# Altium PCB StLink.PcbDoc (part 1 of 3)
Units mm, origin at the board's own origin, x right, y up, seen from the top; angles counter-clockwise.
Board outline 13.1 x 14.6 mm, 6 copper layers (Top Layer, GND, VCC, S3, S4, Bottom Layer), stack 1.623 mm thick; 39 components, 26 nets, 150 pads, 52 vias.
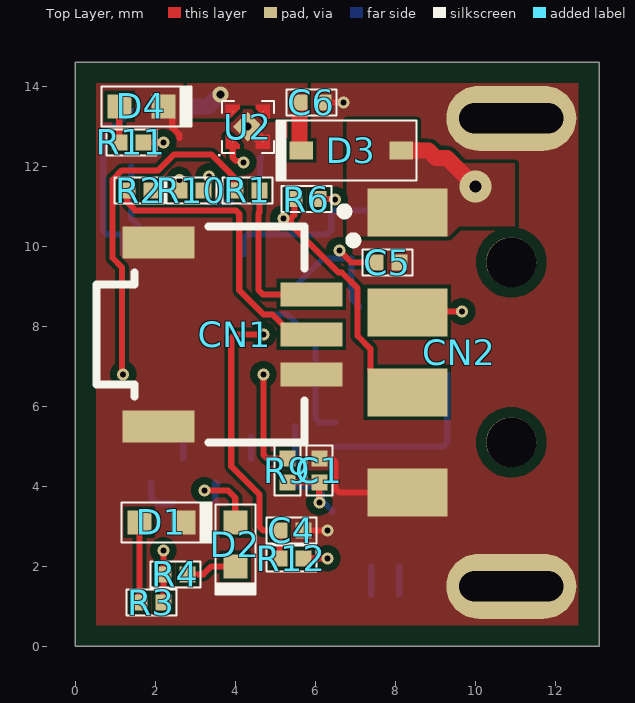
[diagram p0: Top Layer view]
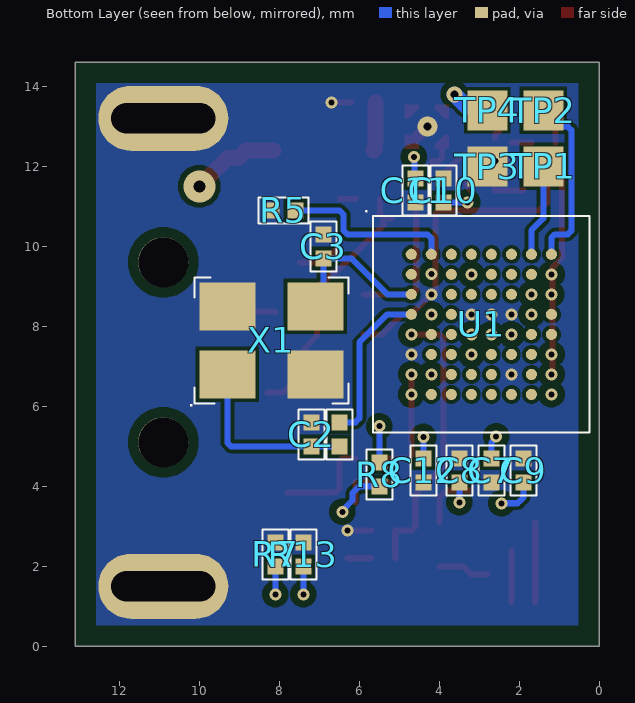
[diagram p1: Bottom Layer view, seen from below]
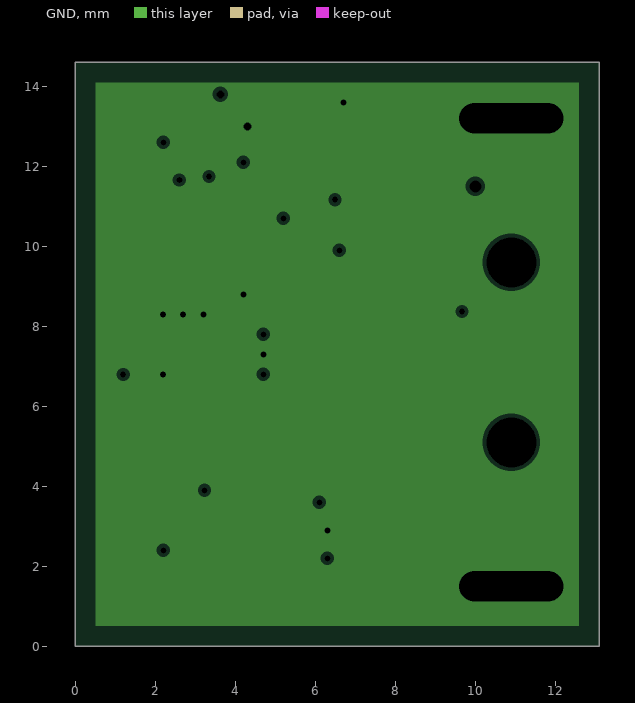
[diagram p2: GND, clearances drawn from the general rule]
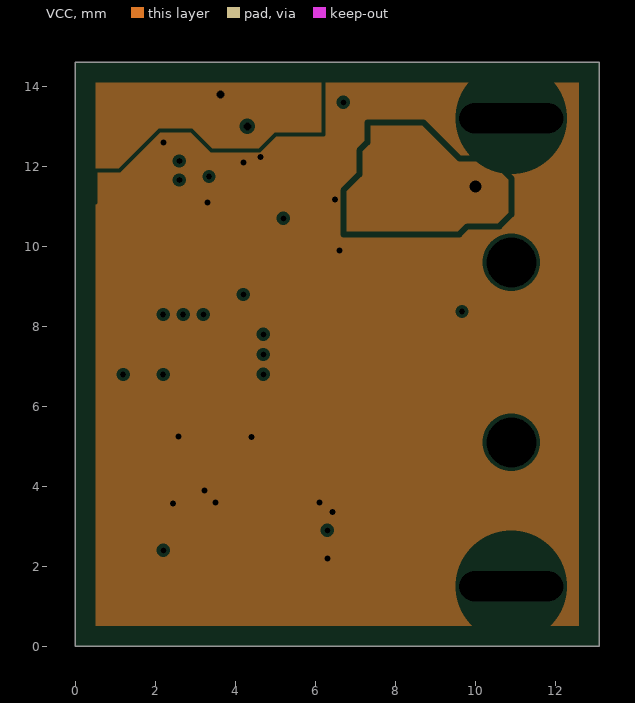
[diagram p3: VCC, clearances drawn from the general rule]
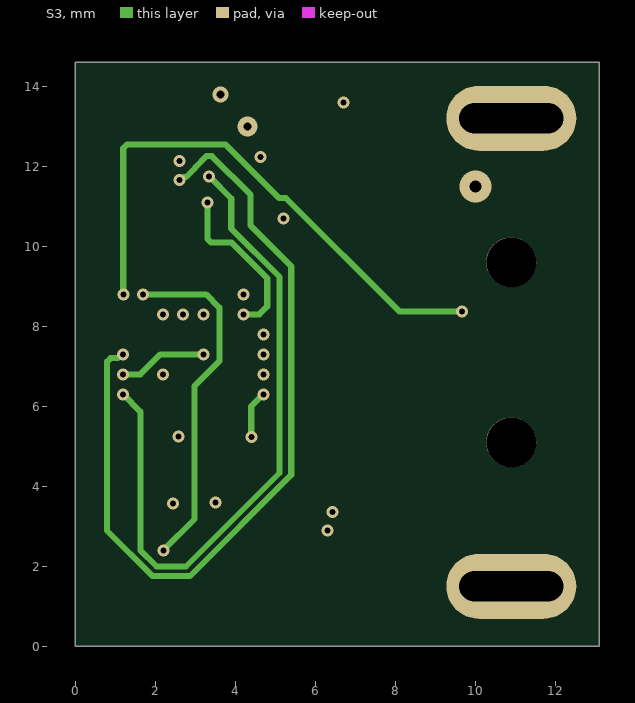
[diagram p4: S3]
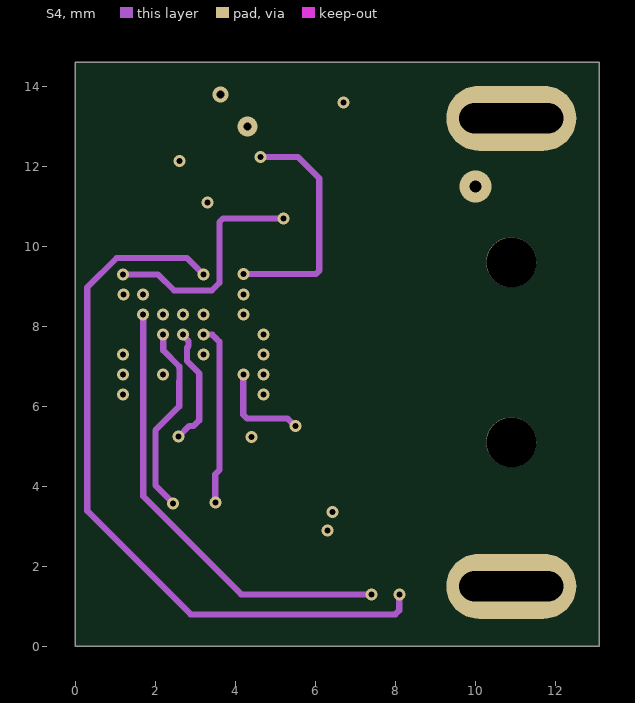
[diagram p5: S4]

## Layer stack, top to bottom
Top Solder: solder mask 0.0102, Solder Resist, Dk 3.5
Top Layer: signal copper 0.0175
Dielectric 1: prepreg 0.196, 7628, Dk 4.74
GND: plane copper 0.035, net GND
Dielectric 2: core 0.43, FR-4, Dk 4.6
VCC: plane copper 0.035, net (Multiple Nets)
Dielectric 3: prepreg 0.196, 7628, Dk 4.74
S3: signal copper 0.035
Dielectric 4: core 0.43, FR-4, Dk 4.6
S4: signal copper 0.035
Dielectric 5: prepreg 0.196, 7628, Dk 4.74
Bottom Layer: signal copper 0.0175
Bottom Solder: solder mask 0.01, Solder Resist, Dk 3.5

## Board outline
0,0 13.1,0 13.1,14.6 0,14.6

## Design rules (kind name [scope] priority, off if disabled: settings)
BoardOutlineClearance [All] p1: gap=0.1 ignorepadtopadclearanceinfootprint=FALSE
Clearance [All] p1: gap=0.089 ignorepadtopadclearanceinfootprint=TRUE except(0.127: Arc-Via Track-Via SMDPad-Via THPad-Via Via-Via Via-Fill Via-Poly Via-Region Via-Text; 0.254: Arc-Hole Track-Hole SMDPad-Hole THPad-Hole Via-Hole Fill-Hole Poly-Hole Region-Hole Text-Hole)
ComponentClearance [All] p1: gap=0.089 collisioncheckmode=3 verticalgap=0.089 showdistances=TRUE
DiffPairsRouting [All] p1: maxlimit=0.089 minlimit=0.089 mostfreqgap=0.089 toplayer_minwidth=0.089 toplayer_maxwidth=25.4 toplayer_prefwidth=0.089 midlayer1_minwidth=0.089 midlayer1_maxwidth=25.4 midlayer1_prefwidth=0.089 midlayer2_minwidth=0.089 midlayer2_maxwidth=25.4 midlayer2_prefwidth=0.089 bottomlayer_minwidth=0.089 bottomlayer_maxwidth=25.4 bottomlayer_prefwidth=0.089 maxuncoupledlength=12.7
Height [All] p1: minheight=0 maxheight=1816.048 prefheight=12.7
HoleSize [All] p1: absolutevalues=TRUE maxlimit=6.3 minlimit=0.1 maxpercent=80.000 minpercent=20.000
HoleToHoleClearance [All] p1: gap=0.1 allowstackedmicrovias=FALSE
MinimumAnnularRing [All] p1: minimumring=0.05
MinimumSolderMaskSliver [All] p1: minsoldermaskwidth=0.1
PlaneClearance [All] p1: clearance=0.089
PlaneConnect PlaneConnectPowerPads [InPadClass('PowerPads')] p1: planeconnectstyle=Direct reliefexpansion=0.508 reliefentries=4 reliefconductorwidth=0.254 reliefairgap=0.254
PlaneConnect [All] p2: pad.planeconnectstyle=Relief pad.reliefexpansion=0.3 pad.reliefentries=4 pad.reliefconductorwidth=0.089 pad.reliefairgap=0.089 via.planeconnectstyle=Direct via.reliefexpansion=0.3 via.reliefentries=4 via.reliefconductorwidth=0.127 via.reliefairgap=0.127
PolygonConnect PolygonConnectPowerPads [All vs (InPadClass('PowerPads'))] p1: connectstyle=Direct reliefconductorwidth=0.254 reliefentries=4 polygonreliefangle="90 Angle" airgapwidth=0.254
PolygonConnect [All] p2: connectstyle=Direct reliefconductorwidth=0.089 reliefentries=4 polygonreliefangle="90 Angle" airgapwidth=0.089
RoutingVias [All] p1: holewidth=0.15 width=0.3 viastyle="Through Hole" minholewidth=0.15 minwidth=0.3 maxholewidth=6.3 maxwidth=6.55
SilkToSilkClearance [All] p1: silktosilkclearance=0.127
SilkToSolderMaskClearance [IsPad] p1: minsilkscreentomaskgap=0.05 clearancetoexposedcopper=TRUE
SolderMaskExpansion [All] p1: expansion=0.051 istentingtop=FALSE
SupplyNets "Schematic Supply Nets_3" [InNet('3.3V')] p1: voltage=0.000
SupplyNets "Schematic Supply Nets_2" [InNet('U5V')] p2: voltage=0.000
SupplyNets "Schematic Supply Nets_1" [InNet('5V')] p3: voltage=0.000
SupplyNets "Schematic Supply Nets" [InNet('GND')] p4: voltage=0.000
UnRoutedNet [All] p1: checkbadconnections=TRUE
Width Width_6mil [All] p1: maxlimit=25.4 minlimit=0.152 preferedwidth=0.152 checkconnectedcopper=TRUE
Width Power_20mil [All] p2: maxlimit=25.4 minlimit=0.508 preferedwidth=0.508 minimp=50.000000 maximp=50.000000 favimp=50.000000
Width Power_12mil [All] p3: maxlimit=25.4 minlimit=0.305 preferedwidth=0.305 minimp=50.000000 maximp=50.000000 favimp=50.000000
Width Width_3.5mil [All] p4: maxlimit=25.4 minlimit=0.089 preferedwidth=0.089 minimp=50.000000 maximp=50.000000 favimp=50.000000
19 further rules are at their usual default settings.

## Components (designator, comment, footprint, x,y, rotation, side; value= is the part's Value field where it differs from the comment)
C1 "100nF" C0201 6.1,4.4 r90 top
C2 "15pF" C0201 7.2,5.3 r270 bottom
C3 "15pF" C0201 6.9,10 r270 bottom
C4 "100nF" C0201 5.4,2.9 r0 top
C5 "1uF" C0201 7.8,9.6 r0 top value=1µF
C6 "1uF" C0201 5.9,13.6 r0 top value=1µF
C7 "100nF" C0201 2.7,4.4 r270 bottom
C8 "100nF" C0201 3.5,4.4 r90 bottom
C9 "100nF" C0201 1.9,4.4 r90 bottom
C10 "100nF" C0201 3.9,11.4 r90 bottom
C11 "100nF" C0201 4.6,11.4 r270 bottom
C12 "100nF" C0201 4.4,4.4 r270 bottom
CN1 "Header 3" H3X1 5.9,7.8 r270 top
CN2 "USB - 0480372200" "USB A" 10.9,7.223 r90 top
D1 "RED" "LED 0402" 2.15,3.1 r180 top
D2 "GREEN" "LED 0402" 4,2.55 r90 top
D3 "BAT54WS-7-F" SOD323 6.9,12.4 r0 top value=10pF
D4 "RED" "LED 0402" 1.65,13.5 r180 top
R1 "100" R0201 4.3,11.4 r180 top value=100Ω
R2 "100" R0201 1.6,11.4 r0 top value=100Ω
R3 "82" R0201 1.9,1.1 r180 top value=82Ω
R4 "82" R0201 2.5,1.8 r0 top value=82Ω
R5 "1K" R0201 7.9,10.9 r180 bottom value=1kΩ
R6 "1.5K" R0201 5.778,11.178 r0 top value=1.5kΩ
R7 "1K" R0201 8.1,2.3 r270 bottom value=1kΩ
R8 "1K" R0201 5.5,4.3 r270 bottom value=1kΩ
R9 "100" R0201 5.3,4.4 r270 top value=100Ω
R10 "82" R0201 2.9,11.4 r0 top value=82Ω
R11 "82" R0201 1.4,12.6 r0 top value=82Ω
R12 "100K" R0201 5.4,2.2 r0 top value=100kΩ
R13 "1K" R0201 7.4,2.3 r270 bottom value=1kΩ
R14 "0" R0201 6.5,5.3 r90 bottom value=0Ω
TP1 "Test_Point" PAD 1.4,12 r90 bottom
TP2 "Test_Point" PAD 1.4,13.4 r90 bottom
TP3 "Test_Point" PAD 2.8,12 r90 bottom
TP4 "Test_Point" PAD 2.8,13.4 r90 bottom
U1 "STM32F103R8H6" "MICRO BGA" 2.949,8.049 r180 bottom
U2 "AP7343D" AP7343D 4.312,12.987 r0 top
X1 "8MHz" "CRISTAL ECS" 8.2,7.65 r180 bottom

## Footprints (in the part's own frame and the unit in brackets; to place one, negate y for a bottom-side part, rotate by r counter-clockwise, add the part's x,y. Pads: shape width x height; smd on the part's side, far side on the other; paste and mask are expansions set on the pad)
AP7343D [mm]
  round 0.025 smd mask+0.04: 1(-0.375,-0.375) 2(0.375,-0.375) 3(0.375,0.375) 4(-0.375,0.375)
  rect 0.53x0.53 smd rot 45 mask+0.04: 5(0,0)
  Top Layer region: -0.2,-0.45 -0.45,-0.2 -0.55,-0.2 -0.55,-0.55 -0.2,-0.55
  Top Layer region: 0.2,0.45 0.45,0.2 0.55,0.2 0.55,0.55 0.2,0.55
  Top Layer region: 0.45,-0.2 0.2,-0.45 0.2,-0.55 0.55,-0.55 0.55,-0.2
  Top Layer region: -0.45,0.2 -0.2,0.45 -0.2,0.55 -0.55,0.55 -0.55,0.2
  silkscreen extent -0.72,-0.72 0.65,0.65, body extent -0.5,-0.5 0.5,0.5, height 0.4
C0201 [mm]
  rect 0.4x0.4 smd mask+0.05: 1(-0.3,0) 2(0.3,0)
  silkscreen extent -0.63,-0.33 0.63,0.33, body extent -0.3,-0.15 0.3,0.15, height 0.27
"CRISTAL ECS" [mm]
  rect 1.4x1.2 smd paste+0 mask+0.05: 1(-1.1,-0.85) 2(1.1,-0.85) 3(1.1,0.85) 4(-1.1,0.85)
  silkscreen extent -2.01,-1.63 1.93,1.58, body extent -1.63,-1.25 1.57,1.25, height 0.81
H3X1 [mm]
  rect 0.6x1.55 smd mask+0.05: 1(-1,0) 2(0,0) 3(1,0)
  rect 0.8x1.8 smd mask+0.05: S1(-2.3,-3.825) S2(2.3,-3.825)
  silkscreen extent -2.7,-5.38 2.7,1.15, body extent -2.7,-5.45 2.7,0.45, height 4.16
"LED 0402" [mm]
  rect 0.6x0.6 smd mask+0.05: 1(-0.55,0) 2(0.55,0)
  silkscreen extent -1.25,-0.5 1,0.5, body extent -0.53,-0.25 0.47,0.25, height 0.4
"MICRO BGA" [mil]
  round 11 smd paste+0 mask+0: A1(-68.95,68.95) A2(-49.25,68.95) A3(-29.55,68.95) A4(-9.85,68.95) A5(9.85,68.95) A6(29.55,68.95) A7(49.25,68.95) A8(68.95,68.95) B1(-68.95,49.25) B2(-49.25,49.25) B3(-29.55,49.25) B4(-9.85,49.25) B5(9.85,49.25) B6(29.55,49.25) B7(49.25,49.25) B8(68.95,49.25) C1(-68.95,29.55) C2(-49.25,29.55) C3(-29.55,29.55) C4(-9.85,29.55) C5(9.85,29.55) C6(29.55,29.55) C7(49.25,29.55) C8(68.95,29.55) D1(-68.95,9.85) D2(-49.25,9.85) D3(-29.55,9.85) D4(-9.85,9.85) D5(9.85,9.85) D6(29.55,9.85) D7(49.25,9.85) D8(68.95,9.85) E1(-68.95,-9.85) E2(-49.25,-9.85) E3(-29.55,-9.85) E4(-9.85,-9.85) E5(9.85,-9.85) E6(29.55,-9.85) E7(49.25,-9.85) E8(68.95,-9.85) F1(-68.95,-29.55) F2(-49.25,-29.55) F3(-29.55,-29.55) F4(-9.85,-29.55) F5(9.85,-29.55) F6(29.55,-29.55) F7(49.25,-29.55) F8(68.95,-29.55) G1(-68.95,-49.25) G2(-49.25,-49.25) G3(-29.55,-49.25) G4(-9.85,-49.25) G5(9.85,-49.25) G6(29.55,-49.25) G7(49.25,-49.25) G8(68.95,-49.25) H1(-68.95,-68.95) H2(-49.25,-68.95) H3(-29.55,-68.95) H4(-9.85,-68.95) H5(9.85,-68.95) H6(29.55,-68.95) H7(49.25,-68.95) H8(68.95,-68.95)
  silkscreen extent -114,-107 107,112, body extent -101,-101 101,101, height 47
PAD [mm]
  rect 1x1 smd mask+0.05: 1(0,0)
R0201 [mm]
  rect 0.4x0.4 smd mask+0.05: 1(-0.3,0) 2(0.3,0)
  silkscreen extent -0.63,-0.33 0.63,0.33, body extent -0.3,-0.15 0.3,0.15, height 0.27
SOD323 [mm]
  rect 0.59x0.45 smd mask+0.05: 1(-1.25,0) 2(1.25,0)
  silkscreen extent -1.88,-0.75 1.63,0.75, body extent -1.35,-0.7 1.35,0.7, height 0.81
"USB A" [mm]
  rect 1.2x2 smd mask+0.05: 1(3.627,2.6) 2(1.127,2.6) 3(-0.873,2.6) 4(-3.373,2.6)
  oval 1.625x3.25 hole 0.75 slot 2.6 at 90 deg mask+0.05: 5(-5.723,0) 6(5.977,0)
  round 1.25 hole 1.25 unplated mask+0.05: ""(-2.123,0) ""(2.377,0)
  silkscreen extent 3.55,4.08 3.75,4.27, body extent -5.92,-17.68 6.12,3.27, height 2.11

## Part data
C1 C4 C7 C8 C9 C10 C11 C12: library part GRM033R60J104KE19D, "6.3V 100nF X5R ±10% 0201 Multilayer Ceramic Capacitors MLCC - SMD/SMT ROHS", Case Code (Imperial)=0201, Case Code (Metric)=0603, Dielectric=X5R, Dielectric Material=Ceramic, Manufacturer=Murata, Manufacturer Lifecycle Status="IN PRODUCTION", Max Operating Temperature=85°C, Min Operating Temperature=-55°C, Supplier Part Number=490-3167-6-ND, Tolerance=10%, Voltage=6.3V, Case/Package=0201, Category="Ceramic Capacitors", ComponentLink1Description=https://datasheet.octopart.com:443/GRM033R60J104KE19D-Murata-datasheet-5390194.pdf?src-supplier=Upverter, ComponentLink1URL=https://datasheet.octopart.com:443/GRM033R60J104KE19D-Murata-datasheet-5390194.pdf?src-supplier=Upverter, ComponentLink2Description=https://datasheet.octopart.com:443/GRM033R60J104KE19D-Murata-datasheet-62317028.pdf?src-supplier=element14+APAC, ComponentLink2URL=https://datasheet.octopart.com:443/GRM033R60J104KE19D-Murata-datasheet-62317028.pdf?src-supplier=element14+APAC, ComponentLink3Description=https://datasheet.octopart.com:443/GRM033R60J104KE19D-Murata-datasheet-17853058.pdf?src-supplier=element14+APAC, ComponentLink3URL=https://datasheet.octopart.com:443/GRM033R60J104KE19D-Murata-datasheet-17853058.pdf?src-supplier=element14+APAC, ComponentLink4Description=https://datasheet.octopart.com:443/GRM033R60J104KE19D-Murata-datasheet-8397485.pdf?src-supplier=Newark, ComponentLink4URL=https://datasheet.octopart.com:443/GRM033R60J104KE19D-Murata-datasheet-8397485.pdf?src-supplier=Newark, ComponentLink5Description=https://datasheet.octopart.com:443/GRM033R60J104KE19D-Murata-datasheet-14399027.pdf?src-supplier=Future+Electronics, ComponentLink5URL=https://datasheet.octopart.com:443/GRM033R60J104KE19D-Murata-datasheet-14399027.pdf?src-supplier=Future+Electronics, ComponentLink6Description=https://datasheet.octopart.com:443/GRM033R60J104KE19D-Murata-datasheet-22122223.pdf?src-supplier=Future+Electronics, ComponentLink6URL=https://datasheet.octopart.com:443/GRM033R60J104KE19D-Murata-datasheet-22122223.pdf?src-supplier=Future+Electronics, ComponentLink7Description=https://datasheet.octopart.com:443/GRM033R60J104KE19D-Murata-datasheet-44105374.pdf?src-supplier=Future+Electronics, ComponentLink7URL=https://datasheet.octopart.com:443/GRM033R60J104KE19D-Murata-datasheet-44105374.pdf?src-supplier=Future+Electronics, ComponentLink8Description=https://datasheet.octopart.com:443/GRM033R60J104KE19D-Murata-datasheet-165579666.pdf?src-supplier=TME, ComponentLink8URL=https://datasheet.octopart.com:443/GRM033R60J104KE19D-Murata-datasheet-165579666.pdf?src-supplier=TME, ComponentLink9Description=https://datasheet.octopart.com:443/GRM033R60J104KE19D-Murata-datasheet-140710156.pdf?src-supplier=TME, ComponentLink9URL=https://datasheet.octopart.com:443/GRM033R60J104KE19D-Murata-datasheet-140710156.pdf?src-supplier=TME, ComponentLink10Description=https://datasheet.octopart.com:443/GRM033R60J104KE19D-Murata-datasheet-141274201.pdf?src-supplier=Ciiva, ComponentLink10URL=https://datasheet.octopart.com:443/GRM033R60J104KE19D-Murata-datasheet-141274201.pdf?src-supplier=Ciiva, ComponentLink11Description=https://datasheet.octopart.com:443/GRM033R60J104KE19D-Murata-datasheet-140675741.pdf?src-supplier=Ciiva, ComponentLink11URL=https://datasheet.octopart.com:443/GRM033R60J104KE19D-Murata-datasheet-140675741.pdf?src-supplier=Ciiva, ComponentLink12Description=https://datasheet.octopart.com:443/GRM033R60J104KE19D-Murata-datasheet-138738333.pdf?src-supplier=Ciiva, ComponentLink12URL=https://datasheet.octopart.com:443/GRM033R60J104KE19D-Murata-datasheet-138738333.pdf?src-supplier=Ciiva, ComponentLink13Description=https://datasheet.octopart.com/GRM033R60J104KE19D-Murata-datasheet-12515295.pdf, ComponentLink13URL=https://datasheet.octopart.com/GRM033R60J104KE19D-Murata-datasheet-12515295.pdf, ComponentLink14Description=https://datasheet.octopart.com/GRM033R60J104KE19D-Murata-datasheet-12510076.pdf, ComponentLink14URL=https://datasheet.octopart.com/GRM033R60J104KE19D-Murata-datasheet-12510076.pdf, ComponentLink15Description=https://datasheet.octopart.com/GRM033R60J104KE19D-Murata-datasheet-11978611.pdf, ComponentLink15URL=https://datasheet.octopart.com/GRM033R60J104KE19D-Murata-datasheet-11978611.pdf, ComponentLink16Description=https://datasheet.octopart.com/GRM033R60J104KE19D-Murata-datasheet-10025737.pdf, ComponentLink16URL=https://datasheet.octopart.com/GRM033R60J104KE19D-Murata-datasheet-10025737.pdf, ComponentLink17Description=https://datasheet.octopart.com/GRM033R60J104KE19D-Murata-datasheet-8819587.pdf, ComponentLink17URL=https://datasheet.octopart.com/GRM033R60J104KE19D-Murata-datasheet-8819587.pdf, ComponentLink18Description=https://datasheet.octopart.com:443/GRM033R60J104KE19D-Murata-datasheet-12510170.pdf?src-supplier=Factory+Futures, ComponentLink18URL=https://datasheet.octopart.com:443/GRM033R60J104KE19D-Murata-datasheet-12510170.pdf?src-supplier=Factory+Futures, ComponentLink19Description=https://datasheet.octopart.com:443/GRM033R60J104KE19D-Murata-datasheet-8517407.pdf?src-supplier=Factory+Futures, ComponentLink19URL=https://datasheet.octopart.com:443/GRM033R60J104KE19D-Murata-datasheet-8517407.pdf?src-supplier=Factory+Futures, ComponentLink20Description=https://datasheet.octopart.com:443/GRM033R60J104KE19D-Murata-datasheet-8387045.pdf?src-supplier=Factory+Futures, ComponentLink20URL=https://datasheet.octopart.com:443/GRM033R60J104KE19D-Murata-datasheet-8387045.pdf?src-supplier=Factory+Futures, ComponentLink21Description=https://datasheet.octopart.com:443/GRM033R60J104KE19D-Murata-datasheet-8324201.pdf?src-supplier=Factory+Futures, ComponentLink21URL=https://datasheet.octopart.com:443/GRM033R60J104KE19D-Murata-datasheet-8324201.pdf?src-supplier=Factory+Futures, ComponentLink22Description=https://datasheet.octopart.com:443/GRM033R60J104KE19D-Murata-datasheet-7628724.pdf?src-supplier=Factory+Futures, ComponentLink22URL=https://datasheet.octopart.com:443/GRM033R60J104KE19D-Murata-datasheet-7628724.pdf?src-supplier=Factory+Futures, ComponentLink23Description=https://datasheet.octopart.com:443/GRM033R60J104KE19D-Murata-datasheet-552801.pdf?src-supplier=Factory+Futures, ComponentLink23URL=https://datasheet.octopart.com:443/GRM033R60J104KE19D-Murata-datasheet-552801.pdf?src-supplier=Factory+Futures, ComponentLink24Description=https://datasheet.octopart.com:443/GRM033R60J104KE19D.-Murata-datasheet-5332913.pdf?src-supplier=Farnell, ComponentLink24URL=https://datasheet.octopart.com:443/GRM033R60J104KE19D.-Murata-datasheet-5332913.pdf?src-supplier=Farnell, ComponentLink25Description=https://datasheet.octopart.com:443/GRM033R60J104KE19D-Murata-datasheet-148210.pdf?src-supplier=Garrett, ComponentLink25URL=https://datasheet.octopart.com:443/GRM033R60J104KE19D-Murata-datasheet-148210.pdf?src-supplier=Garrett, ComponentLink26Description=https://datasheet.octopart.com:443/GRM033R60J104KE19D-Murata-datasheet-118811.pdf?src-supplier=DigiKey, ComponentLink26URL=https://datasheet.octopart.com:443/GRM033R60J104KE19D-Murata-datasheet-118811.pdf?src-supplier=DigiKey, ComponentLink27Description=http://sigma.octopart.com:80/reach_statement/Murata-company-16.pdf?src-supplier=Compliance+Statements, ComponentLink27URL=http://sigma.octopart.com:80/reach_statement/Murata-company-16.pdf?src-supplier=Compliance+Statements, Country of Origin=Philippines, Depth=300µm, Export Control Classification Number (ECCN) Code=EAR99, Harmonized Tariff Schedule (HTS) Code=8532.24.00.20, Height=300µm, Introduction Date=2004-09-04, Lead Free="Lead Free", Length=600µm, Lifecycle Status=Production, Manufacturer Part Number=GRM033R60J104KE19D, Material=Ceramic, Mounting Technology="Surface Mount", Number of Terminals=2, Packaging="Cut Tape (CT)", Pins=2, Pricing="1=0,1, 10=0,013, 50=0,0084, 100=0,007, 500=0,00476, 1000=0,00409, 2500=0,00338, 5000=0,00295 (USD)", Radiation Hardening=No, REACH SVHC=Yes, RoHS=Compliant, Schedule B="8532240020, 8532240020|8532240020, 8532240020|8532240020|8532240020, 8532240020|8532240020|8532240020|8532240020", Stock=19959733, Supplier=DigiKey, Supplier 1=DigiKey, Supplier Part Number 1=490-3167-6-ND, Termination=SMD/SMT, Thickness=300µm, Voltage Rating=6.3V, Voltage Rating (DC)=6.3V, Weight=170.097139µg, Width=300µm
C2 C3: library part GRM0335C1E150JA01D, "25V 15pF C0G ±5% 0201 Multilayer Ceramic Capacitors MLCC - SMD/SMT ROHS", Case Code (Imperial)=0201, Case Code (Metric)=0603, Dielectric=C0G, Dielectric Material=Ceramic, Manufacturer=Murata, Manufacturer Lifecycle Status="IN PRODUCTION", Max Operating Temperature=125°C, Min Operating Temperature=-55°C, Supplier Part Number=490-9658-1-ND, Temperature Coefficient=30ppm/°C, Tolerance=5%, Voltage Rating=25V, Case/Package=0201, Category="Ceramic Capacitors", ComponentLink1Description=https://datasheet.octopart.com:443/GRM0335C1E150JA01D-Murata-datasheet-62317006.pdf?src-supplier=element14+APAC, ComponentLink1URL=https://datasheet.octopart.com:443/GRM0335C1E150JA01D-Murata-datasheet-62317006.pdf?src-supplier=element14+APAC, ComponentLink2Description=https://datasheet.octopart.com:443/GRM0335C1E150JA01D-Murata-datasheet-12532738.pdf?src-supplier=HQonline, ComponentLink2URL=https://datasheet.octopart.com:443/GRM0335C1E150JA01D-Murata-datasheet-12532738.pdf?src-supplier=HQonline, ComponentLink3Description=https://datasheet.octopart.com:443/GRM0335C1E150JA01D-Murata-datasheet-165579666.pdf?src-supplier=TME, ComponentLink3URL=https://datasheet.octopart.com:443/GRM0335C1E150JA01D-Murata-datasheet-165579666.pdf?src-supplier=TME, ComponentLink4Description=https://datasheet.octopart.com:443/GRM0335C1E150JA01D-Murata-datasheet-141273935.pdf?src-supplier=Ciiva, ComponentLink4URL=https://datasheet.octopart.com:443/GRM0335C1E150JA01D-Murata-datasheet-141273935.pdf?src-supplier=Ciiva, ComponentLink5Description=https://datasheet.octopart.com:443/GRM0335C1E150JA01D-Murata-datasheet-140673894.pdf?src-supplier=Ciiva, ComponentLink5URL=https://datasheet.octopart.com:443/GRM0335C1E150JA01D-Murata-datasheet-140673894.pdf?src-supplier=Ciiva, ComponentLink6Description=https://datasheet.octopart.com:443/GRM0335C1E150JA01D-Murata-datasheet-138736674.pdf?src-supplier=Ciiva, ComponentLink6URL=https://datasheet.octopart.com:443/GRM0335C1E150JA01D-Murata-datasheet-138736674.pdf?src-supplier=Ciiva, ComponentLink7Description=https://datasheet.octopart.com:443/GRM0335C1E150JA01D-Murata-datasheet-22122223.pdf?src-supplier=Future+Electronics, ComponentLink7URL=https://datasheet.octopart.com:443/GRM0335C1E150JA01D-Murata-datasheet-22122223.pdf?src-supplier=Future+Electronics, ComponentLink8Description=https://datasheet.octopart.com/GRM0335C1E150JA01D-Murata-datasheet-12515295.pdf, ComponentLink8URL=https://datasheet.octopart.com/GRM0335C1E150JA01D-Murata-datasheet-12515295.pdf, ComponentLink9Description=https://datasheet.octopart.com/GRM0335C1E150JA01D-Murata-datasheet-12510076.pdf, ComponentLink9URL=https://datasheet.octopart.com/GRM0335C1E150JA01D-Murata-datasheet-12510076.pdf, ComponentLink10Description=https://datasheet.octopart.com/GRM0335C1E150JA01D-Murata-datasheet-11978611.pdf, ComponentLink10URL=https://datasheet.octopart.com/GRM0335C1E150JA01D-Murata-datasheet-11978611.pdf, ComponentLink11Description=https://datasheet.octopart.com/GRM0335C1E150JA01D-Murata-datasheet-10025737.pdf, ComponentLink11URL=https://datasheet.octopart.com/GRM0335C1E150JA01D-Murata-datasheet-10025737.pdf, ComponentLink12Description=https://datasheet.octopart.com/GRM0335C1E150JA01D-Murata-datasheet-8819587.pdf, ComponentLink12URL=https://datasheet.octopart.com/GRM0335C1E150JA01D-Murata-datasheet-8819587.pdf, ComponentLink13Description=https://datasheet.octopart.com/GRM0335C1E150JA01D-Murata-datasheet-14397959.pdf, ComponentLink13URL=https://datasheet.octopart.com/GRM0335C1E150JA01D-Murata-datasheet-14397959.pdf, ComponentLink14Description=http://sigma.octopart.com:80/reach_statement/Murata-company-16.pdf?src-supplier=Compliance+Statements, ComponentLink14URL=http://sigma.octopart.com:80/reach_statement/Murata-company-16.pdf?src-supplier=Compliance+Statements, Depth=300µm, Height=300µm, Lead Free="Lead Free", Length=600µm, Lifecycle Status=Production, Manufacturer Part Number=GRM0335C1E150JA01D, Material=Ceramic, Mounting Technology="Surface Mount", Number of Terminals=2, Packaging="Cut Tape", Pricing="1=0,1, 10=0,014, 50=0,009, 100=0,0076, 500=0,00518, 1000=0,00446, 2500=0,00369, 5000=0,00323 (USD)", Radiation Hardening=No, REACH SVHC=Yes, RoHS=Compliant, Schedule B="8532240020, 8532240020|8532240020, 8532240020|8532240020|8532240020, 8532240020|8532240020|8532240020|8532240020", Stock=436682, Supplier=DigiKey, Supplier 1=DigiKey, Supplier Part Number 1=490-9658-1-ND, Termination=SMD/SMT, Thickness=300µm, Voltage Rating (DC)=25V, Width=300µm
C5 C6: library part GRM033R61C105ME15D, "16V 1uF X5R ±20% 0201 Multilayer Ceramic Capacitors MLCC - SMD/SMT ROHS", Case/Package=0201, Dielectric=X5R, Dielectric Material=Ceramic, Manufacturer=Murata, Manufacturer Lifecycle Status="IN PRODUCTION", Max Operating Temperature=85°C, Min Operating Temperature=-55°C, Supplier Part Number=490-18654-1-ND, Tolerance=20%, Voltage Rating=16V, Category="Ceramic Capacitors", ComponentLink1Description=https://datasheet.octopart.com:443/GRM033R61C105ME15D-Murata-datasheet-155345049.pdf?src-supplier=Newark, ComponentLink1URL=https://datasheet.octopart.com:443/GRM033R61C105ME15D-Murata-datasheet-155345049.pdf?src-supplier=Newark, ComponentLink2Description=https://datasheet.octopart.com:443/GRM033R61C105ME15D-Murata-datasheet-165579666.pdf?src-supplier=TME, ComponentLink2URL=https://datasheet.octopart.com:443/GRM033R61C105ME15D-Murata-datasheet-165579666.pdf?src-supplier=TME, ComponentLink3Description=https://datasheet.octopart.com:443/GRM033R61C105ME15D-Murata-datasheet-141274201.pdf?src-supplier=Ciiva, ComponentLink3URL=https://datasheet.octopart.com:443/GRM033R61C105ME15D-Murata-datasheet-141274201.pdf?src-supplier=Ciiva, ComponentLink4Description=https://datasheet.octopart.com:443/GRM033R61C105ME15D-Murata-datasheet-140676397.pdf?src-supplier=Ciiva, ComponentLink4URL=https://datasheet.octopart.com:443/GRM033R61C105ME15D-Murata-datasheet-140676397.pdf?src-supplier=Ciiva, ComponentLink5Description=https://datasheet.octopart.com:443/GRM033R61C105ME15D-Murata-datasheet-138738456.pdf?src-supplier=Ciiva, ComponentLink5URL=https://datasheet.octopart.com:443/GRM033R61C105ME15D-Murata-datasheet-138738456.pdf?src-supplier=Ciiva, ComponentLink6Description=https://datasheet.octopart.com/GRM033R61C105ME15D-Murata-datasheet-12515295.pdf, ComponentLink6URL=https://datasheet.octopart.com/GRM033R61C105ME15D-Murata-datasheet-12515295.pdf, ComponentLink7Description=https://datasheet.octopart.com/GRM033R61C105ME15D-Murata-datasheet-12510076.pdf, ComponentLink7URL=https://datasheet.octopart.com/GRM033R61C105ME15D-Murata-datasheet-12510076.pdf, ComponentLink8Description=https://datasheet.octopart.com/GRM033R61C105ME15D-Murata-datasheet-11978611.pdf, ComponentLink8URL=https://datasheet.octopart.com/GRM033R61C105ME15D-Murata-datasheet-11978611.pdf, ComponentLink9Description=https://datasheet.octopart.com/GRM033R61C105ME15D-Murata-datasheet-10025737.pdf, ComponentLink9URL=https://datasheet.octopart.com/GRM033R61C105ME15D-Murata-datasheet-10025737.pdf, ComponentLink10Description=https://datasheet.octopart.com/GRM033R61C105ME15D-Murata-datasheet-8819587.pdf, ComponentLink10URL=https://datasheet.octopart.com/GRM033R61C105ME15D-Murata-datasheet-8819587.pdf, ComponentLink11Description=http://sigma.octopart.com:80/reach_statement/Murata-company-16.pdf?src-supplier=Compliance+Statements, ComponentLink11URL=http://sigma.octopart.com:80/reach_statement/Murata-company-16.pdf?src-supplier=Compliance+Statements, Country of Origin="Japan, Mainland China, Philippines, Singapore, Thailand", Export Control Classification Number (ECCN) Code=EAR99, Harmonized Tariff Schedule (HTS) Code=8532.24.00.20, Height=300µm, Introduction Date=2021-04-22, Length=600µm, Lifecycle Status=Production, Manufacturer Part Number=GRM033R61C105ME15D, Material=Ceramic, Mounting Technology="Surface Mount", Number of Terminals=2, Pricing="1=0,14, 10=0,078, 50=0,0542, 100=0,0471, 500=0,03512, 1000=0,03144, 2500=0,02756, 5000=0,02522 (USD)", REACH SVHC=Yes, RoHS=Compliant, Stock=494203, Supplier=DigiKey, Supplier 1=DigiKey, Supplier Part Number 1=490-18654-1-ND, Thickness=300µm, Voltage Rating (DC)=16V, Width=300µm
CN1: library part T1M-03-F-SH-L, "Conn Shrouded Header (4 Sides) HDR 3 POS 1mm Solder RA Side Entry SMD Micro Mate™ Bulk", Color=Natural, Manufacturer=Samtec, Manufacturer Lifecycle Status=PRODUCTION, Supplier Part Number=612-T1M-03-F-SH-LCT-ND, Category="Headers and Wire Housings", ComponentLink1Description=https://datasheet.octopart.com:443/T1M-03-F-SH-L-Samtec-datasheet-97293726.pdf?src-supplier=Samtec, ComponentLink1URL=https://datasheet.octopart.com:443/T1M-03-F-SH-L-Samtec-datasheet-97293726.pdf?src-supplier=Samtec, ComponentLink2Description=https://sigma.octopart.com:443/97293727/technical_drawing/Samtec-T1M-03-F-SH-L.pdf?src-supplier=Samtec, ComponentLink2URL=https://sigma.octopart.com:443/97293727/technical_drawing/Samtec-T1M-03-F-SH-L.pdf?src-supplier=Samtec, ComponentLink3Description=https://datasheet.octopart.com:443/T1M-03-F-SH-L-Samtec-datasheet-129018845.pdf?src-supplier=element14+APAC, ComponentLink3URL=https://datasheet.octopart.com:443/T1M-03-F-SH-L-Samtec-datasheet-129018845.pdf?src-supplier=element14+APAC, ComponentLink4Description=https://datasheet.octopart.com:443/T1M-03-F-SH-L-Samtec-datasheet-148850559.pdf?src-supplier=Toby+Electronics, ComponentLink4URL=https://datasheet.octopart.com:443/T1M-03-F-SH-L-Samtec-datasheet-148850559.pdf?src-supplier=Toby+Electronics, ComponentLink5Description=https://datasheet.octopart.com:443/T1M-03-F-SH-L-Samtec-datasheet-116535276.pdf?src-supplier=Toby+Electronics, ComponentLink5URL=https://datasheet.octopart.com:443/T1M-03-F-SH-L-Samtec-datasheet-116535276.pdf?src-supplier=Toby+Electronics, ComponentLink6Description=https://datasheet.octopart.com:443/T1M-03-F-SH-L-Samtec-datasheet-136395486.pdf?src-supplier=Toby+Electronics, ComponentLink6URL=https://datasheet.octopart.com:443/T1M-03-F-SH-L-Samtec-datasheet-136395486.pdf?src-supplier=Toby+Electronics, ComponentLink7Description=https://datasheet.octopart.com:443/T1M-03-F-SH-L-Samtec-datasheet-86810868.pdf?src-supplier=Sager+Electronics, ComponentLink7URL=https://datasheet.octopart.com:443/T1M-03-F-SH-L-Samtec-datasheet-86810868.pdf?src-supplier=Sager+Electronics, Lifecycle Status=Production, Manufacturer Part Number=T1M-03-F-SH-L, Orientation=Vertical, Pins=3, Pricing="1=2,07, 10=1,76, 25=1,6492, 50=1,5704, 100=1,4953, 250=1,40164 (USD)", Stock=680, Supplier=DigiKey, Supplier 1=DigiKey, Supplier Part Number 1=612-T1M-03-F-SH-LCT-ND
CN2: library part 48037-2200, "USB Connector, 4 Contact(s), Male, Right Angle, Surface Mount Terminal, Locking, Plug", Color=Black, Current Rating=1.5A, Insulation Resistance=1GΩ, Manufacturer=Molex, Manufacturer Lifecycle Status=ACTIVE, Max Operating Temperature=85°C, Max Voltage Rating (AC)=150V, Min Operating Temperature=-20°C, Supplier Part Number=WM3983DKR-ND, Category="USB Connectors", China RoHS=Compliant, ComponentLink1Description=https://datasheet.octopart.com:443/480372200-Molex-datasheet-142372981.pdf?src-supplier=Upverter, ComponentLink1URL=https://datasheet.octopart.com:443/480372200-Molex-datasheet-142372981.pdf?src-supplier=Upverter, ComponentLink2Description=https://datasheet.octopart.com:443/48037-2200-Molex-datasheet-62059301.pdf?src-supplier=Upverter, ComponentLink2URL=https://datasheet.octopart.com:443/48037-2200-Molex-datasheet-62059301.pdf?src-supplier=Upverter, ComponentLink3Description=https://datasheet.octopart.com:443/480372200-Molex-datasheet-8344610.pdf?src-supplier=HQonline, ComponentLink3URL=https://datasheet.octopart.com:443/480372200-Molex-datasheet-8344610.pdf?src-supplier=HQonline, ComponentLink4Description=https://datasheet.octopart.com:443/48037-2200-Molex-datasheet-13746345.pdf?src-supplier=Sager+Electronics, ComponentLink4URL=https://datasheet.octopart.com:443/48037-2200-Molex-datasheet-13746345.pdf?src-supplier=Sager+Electronics, ComponentLink5Description=https://datasheet.octopart.com:443/48037-2200-Molex-datasheet-193109030.pdf?src-supplier=JRH+Electronics, ComponentLink5URL=https://datasheet.octopart.com:443/48037-2200-Molex-datasheet-193109030.pdf?src-supplier=JRH+Electronics, ComponentLink6Description=https://sigma.octopart.com:443/16400051/technical_drawing/Molex-48037-2200.pdf?src-supplier=Molex, ComponentLink6URL=https://sigma.octopart.com:443/16400051/technical_drawing/Molex-48037-2200.pdf?src-supplier=Molex, ComponentLink7Description=https://datasheet.octopart.com:443/48037-2200-Molex-datasheet-77558076.pdf?src-supplier=Farnell, ComponentLink7URL=https://datasheet.octopart.com:443/48037-2200-Molex-datasheet-77558076.pdf?src-supplier=Farnell, ComponentLink8Description=https://datasheet.octopart.com:443/48037-2200-Molex-datasheet-154752285.pdf?src-supplier=Master+Electronics, ComponentLink8URL=https://datasheet.octopart.com:443/48037-2200-Molex-datasheet-154752285.pdf?src-supplier=Master+Electronics, ComponentLink9Description=https://datasheet.octopart.com:443/48037-2200-Molex-datasheet-66635163.pdf?src-supplier=Newark, ComponentLink9URL=https://datasheet.octopart.com:443/48037-2200-Molex-datasheet-66635163.pdf?src-supplier=Newark, ComponentLink10Description=https://datasheet.octopart.com:443/48037-2200-Molex-datasheet-168216728.pdf?src-supplier=TME, ComponentLink10URL=https://datasheet.octopart.com:443/48037-2200-Molex-datasheet-168216728.pdf?src-supplier=TME, ComponentLink11Description=https://datasheet.octopart.com:443/48037-2200-Molex-datasheet-140185240.pdf?src-supplier=RS+(Formerly+Allied+Electronics), ComponentLink11URL=https://datasheet.octopart.com:443/48037-2200-Molex-datasheet-140185240.pdf?src-supplier=RS+(Formerly+Allied+Electronics), ComponentLink12Description=https://datasheet.octopart.com:443/48037-2200-Molex-datasheet-120151368.pdf?src-supplier=RS+(Formerly+Allied+Electronics), ComponentLink12URL=https://datasheet.octopart.com:443/48037-2200-Molex-datasheet-120151368.pdf?src-supplier=RS+(Formerly+Allied+Electronics), ComponentLink13Description=https://datasheet.octopart.com:443/48037-2200-Molex-datasheet-62104878.pdf?src-supplier=Electro+Sonic, ComponentLink13URL=https://datasheet.octopart.com:443/48037-2200-Molex-datasheet-62104878.pdf?src-supplier=Electro+Sonic, ComponentLink14Description=https://datasheet.octopart.com:443/48037-2200-Molex-datasheet-41578501.pdf?src-supplier=Electro+Sonic, ComponentLink14URL=https://datasheet.octopart.com:443/48037-2200-Molex-datasheet-41578501.pdf?src-supplier=Electro+Sonic, ComponentLink15Description=https://datasheet.octopart.com:443/48037-2200-Molex-datasheet-27085190.pdf?src-supplier=Electro+Sonic, ComponentLink15URL=https://datasheet.octopart.com:443/48037-2200-Molex-datasheet-27085190.pdf?src-supplier=Electro+Sonic, ComponentLink16Description=http://sigma.octopart.com:80/16400050/rohs_statement/Molex-48037-2200.pdf?src-supplier=Compliance+Statements, ComponentLink16URL=http://sigma.octopart.com:80/16400050/rohs_statement/Molex-48037-2200.pdf?src-supplier=Compliance+Statements, ComponentLink17Description=http://sigma.octopart.com:80/reach_statement/Molex-company-74.pdf?src-supplier=Compliance+Statements, ComponentLink17URL=http://sigma.octopart.com:80/reach_statement/Molex-company-74.pdf?src-supplier=Compliance+Statements, ComponentLink18Description=http://sigma.octopart.com:80/rohs_statement/Molex-company-73.pdf?src-supplier=Compliance+Statements, ComponentLink18URL=http://sigma.octopart.com:80/rohs_statement/Molex-company-73.pdf?src-supplier=Compliance+Statements, ComponentLink19Description=http://sigma.octopart.com:80/conflict_mineral_statement/Molex-company-72.pdf?src-supplier=Compliance+Statements, ComponentLink19URL=http://sigma.octopart.com:80/conflict_mineral_statement/Molex-company-72.pdf?src-supplier=Compliance+Statements, Connector Type="Plug, USB", Contact Material=Brass, Contact Plating=Gold, Country of Origin=HK, Export Control Classification Number (ECCN) Code=EAR99, Gender=Male, Halogen Free="Low Halogen", Harmonized Tariff Schedule (HTS) Code=8536.69.40.30, Height=4.6mm, Housing Material=Nylon, Introduction Date=2007-05-29, Lifecycle Status=Production, LTB Date=2014-09-01, LTD Date=2014-12-31, Manufacturer Part Number=48037-2200, Mounting Technology="Surface Mount", Number of Circuits=4, Number of Contacts=4, Number of Ports=1, Number of Positions=4, Number of Rows=1, Number of Terminals=4, Orientation="Right Angle", Packaging="Cut Tape", Pins=4, Pitch=2mm, Plating=Tin, Plating Thickness=762nm, Pricing="1=1,32, 10=1,123, 25=1,0524, 50=1,0022, 100=0,9543 (USD)", Radiation Hardening=No, REACH SVHC=Yes, RoHS=Compliant, Schedule B="8536695050, 8536695050|8536695050|8536695050|8536695050|8536695050", Shell Finish=Nickel, Shell Material=Steel, Stock=10090, Supplier=DigiKey, Supplier 1=DigiKey, Supplier Part Number 1=WM3983DKR-ND, Terminal Pitch=2mm, Termination=Solder, USB Standard="USB 2.0", Voltage Rating=150V, Voltage Rating (AC)=150V
D1 D4: library part 150040RS73240, "Wurth Elektronik LED, WL-SMCC, 1005 (0402), 625 nm, 1 x 0.5 x 0.4mm", Case/Package=0402, Color=Red, Forward Current=60mA, Forward Voltage=2V, Manufacturer="Wurth Elektronik", Manufacturer Lifecycle Status=ACTIVE, Max Junction Temperature (Tj)=95°C, Max Operating Temperature=85°C, Max Reverse Voltage (DC)=5V, Min Operating Temperature=-40°C, Power Dissipation=72mW, Supplier Part Number=732-11991-1-ND, Category=LEDs, ComponentLink1Description=https://datasheet.octopart.com:443/150040RS73240-W%C3%BCrth-Elektronik-datasheet-140170125.pdf?src-supplier=Wurth+Elektronik, ComponentLink1URL=https://datasheet.octopart.com:443/150040RS73240-W%C3%BCrth-Elektronik-datasheet-140170125.pdf?src-supplier=Wurth+Elektronik, Dominant Wavelength=625nm, Height=400µm, Length=1mm, Lifecycle Status=Production, Luminous Intensity=100mcd, Manufacturer Part Number=150040RS73240, Packaging="Tape and Reel", Peak Wavelength=630nm, Pricing="1=0,32, 10=0,271, 100=0,244, 500=0,217, 1000=0,191 (USD)", Reverse Voltage=5V, RoHS=Compliant, Stock=5288, Supplier=DigiKey, Supplier 1=DigiKey, Supplier Part Number 1=732-11991-1-ND, Viewing Angle=120°, Wavelength=625nm, Width=500µm, YEOL="1 = Estimated lifetime > 10 years"
D2: library part 150040VS73240, "Wurth Elektronik LED, WL-SMCC, 1005 (0402), 570 nm, 1 x 0.5 x 0.4mm", Case/Package=0402, Color=Green, Forward Current=60mA, Forward Voltage=2V, Manufacturer="Wurth Elektronik", Manufacturer Lifecycle Status=ACTIVE, Max Junction Temperature (Tj)=95°C, Max Operating Temperature=85°C, Max Reverse Voltage (DC)=5V, Min Operating Temperature=-40°C, Power Dissipation=75mW, Supplier Part Number=732-11992-1-ND, Category=LEDs, ComponentLink1Description=https://datasheet.octopart.com:443/150040VS73240-W%C3%BCrth-Elektronik-datasheet-140170126.pdf?src-supplier=Wurth+Elektronik, ComponentLink1URL=https://datasheet.octopart.com:443/150040VS73240-W%C3%BCrth-Elektronik-datasheet-140170126.pdf?src-supplier=Wurth+Elektronik, Dominant Wavelength=570nm, Height=400µm, Length=1mm, Lifecycle Status=Production, Luminous Intensity=50mcd, Manufacturer Part Number=150040VS73240, Packaging="Tape and Reel", Peak Wavelength=572nm, Pricing="1=0,32, 10=0,271, 100=0,244, 500=0,217, 1000=0,191 (USD)", Reverse Voltage=5V, RoHS=Compliant, Stock=80192, Supplier=DigiKey, Supplier 1=DigiKey, Supplier Part Number 1=732-11992-1-ND, Viewing Angle=120°, Wavelength=570nm, Width=500µm, YEOL="1 = Estimated lifetime > 10 years"
D3: "Schottky Diode Sod323 T&r 3K Rohs Compliant: Yes", Average Rectified Current=100mA, Current Rating=200mA, Forward Voltage=1V, Manufacturer="Diodes Inc.", Max Forward Surge Current (Ifsm)=600mA, Max Junction Temperature (Tj)=150°C, Max Power Dissipation=200mW, Max Repetitive Reverse Voltage (Vrrm)=30V, Min Operating Temperature=-65°C, Peak Reverse Current=2µA, Reverse Standoff Voltage=25V, Reverse Voltage=21V, Supplier Part Number=BAT54WS-FDICT-ND, Category="Schottky Diodes", China RoHS=Compliant, ComponentLink1Description=https://datasheet.octopart.com:443/BAT54WS-7-F-Diodes-Inc.-datasheet-166296601.pdf?src-supplier=IHS, ComponentLink1URL=https://datasheet.octopart.com:443/BAT54WS-7-F-Diodes-Inc.-datasheet-166296601.pdf?src-supplier=IHS, ComponentLink2Description=https://datasheet.octopart.com:443/BAT54WS-7-F-Diodes-Inc.-datasheet-134530444.pdf?src-supplier=ODG+(Origin+Data+Global), ComponentLink2URL=https://datasheet.octopart.com:443/BAT54WS-7-F-Diodes-Inc.-datasheet-134530444.pdf?src-supplier=ODG+(Origin+Data+Global), ComponentLink3Description=https://sigma.octopart.com:443/138810740/technical_drawing/Diodes-Inc.-BAT54WS-7-F.pdf?src-supplier=Diodes+Inc+SCT, ComponentLink3URL=https://sigma.octopart.com:443/138810740/technical_drawing/Diodes-Inc.-BAT54WS-7-F.pdf?src-supplier=Diodes+Inc+SCT, ComponentLink4Description=https://datasheet.octopart.com:443/BAT54WS-7-F-Diodes-Inc.-datasheet-38879683.pdf?src-supplier=Newark, ComponentLink4URL=https://datasheet.octopart.com:443/BAT54WS-7-F-Diodes-Inc.-datasheet-38879683.pdf?src-supplier=Newark, ComponentLink5Description=https://datasheet.octopart.com:443/BAT54WS-7-F-Diodes-Inc.-datasheet-8330708.pdf?src-supplier=element14+APAC, ComponentLink5URL=https://datasheet.octopart.com:443/BAT54WS-7-F-Diodes-Inc.-datasheet-8330708.pdf?src-supplier=element14+APAC, ComponentLink6Description=https://datasheet.octopart.com:443/BAT54WS-7-F-Diodes-Inc.-datasheet-62304969.pdf?src-supplier=Future+Electronics, ComponentLink6URL=https://datasheet.octopart.com:443/BAT54WS-7-F-Diodes-Inc.-datasheet-62304969.pdf?src-supplier=Future+Electronics, ComponentLink7Description=https://datasheet.octopart.com:443/BAT54WS-7-F-Diodes-Inc.-datasheet-14053335.pdf?src-supplier=iiiC, ComponentLink7URL=https://datasheet.octopart.com:443/BAT54WS-7-F-Diodes-Inc.-datasheet-14053335.pdf?src-supplier=iiiC, ComponentLink8Description=https://datasheet.octopart.com:443/BAT54WS-7-F-Diodes-Inc.-datasheet-8193963.pdf?src-supplier=Jameco, ComponentLink8URL=https://datasheet.octopart.com:443/BAT54WS-7-F-Diodes-Inc.-datasheet-8193963.pdf?src-supplier=Jameco, ComponentLink9Description=https://datasheet.octopart.com:443/BAT54WS-7-F-Diodes-Inc.-datasheet-130944.pdf?src-supplier=DigiKey, ComponentLink9URL=https://datasheet.octopart.com:443/BAT54WS-7-F-Diodes-Inc.-datasheet-130944.pdf?src-supplier=DigiKey, ComponentLink10Description=http://sigma.octopart.com:80/15616894/materials_sheet/Diodes-Inc.-BAT54WS-7-F.pdf?src-supplier=Compliance+Statements, ComponentLink10URL=http://sigma.octopart.com:80/15616894/materials_sheet/Diodes-Inc.-BAT54WS-7-F.pdf?src-supplier=Compliance+Statements, Contact Plating=Tin, Country of Origin="Mainland China, Taiwan", Element Configuration=Single, Export Control Classification Number (ECCN) Code=EAR99, Forward Current=200mA, Harmonized Tariff Schedule (HTS) Code=8541.10.00.70, Height=1.2mm, Introduction Date=2002-09-16, Lead Free="Lead Free", Length=1.8mm, Lifecycle Status=Production, Manufacturer Part Number=BAT54WS-7-F, Max Operating Temperature=150°C, Max Output current=100mA, Max Reverse Voltage (DC)=30V, Min Breakdown Voltage=30V, Mounting Technology="Surface Mount", Number of Elements=1, Number of Terminals=2, Output Current=100mA, Packaging="Cut Tape", Parameter 1=C124205, Peak Non-Repetitive Surge Current=600mA, Pins=2, Polarity=Standard, Power Dissipation=200mW, Power Rating=200mW, Pricing="1=0,1, 10=0,064, 100=0,0617, 500=0,04736, 1000=0,04232 (USD)", Radiation Hardening=No, REACH SVHC=Yes, Reverse Recovery Time=5ns, RoHS=Compliant, Schedule B="8541100070, 8541100070|8541100070|8541100070|8541100070|8541100070", Stock=46117, Supplier=DigiKey, Supplier 1=DigiKey, Supplier Location 1=US, Supplier Packaging 1="Cut Tape", Supplier Part Number 1=BAT54WS-FDICT-ND, Supplier Unit Price 1=$0.10, Voltage Rating (DC)=30V, Weight=4.904468mg, Width=1.4mm
R1 R2 R9: library part RC0201FR-07100RL, "50mW Thick Film Resistors 25V ±1% ±200ppm/℃ 100Ω 0201 Chip Resistor - Surface Mount ROHS", Case Code (Imperial)=0201, Case Code (Metric)=0603, Manufacturer="Yageo Group", Max Operating Temperature=125°C, Max Power Dissipation=50mW, Min Operating Temperature=-55°C, Supplier Part Number=311-100MCT-ND, Temperature Coefficient=200ppm/°C, Tolerance=1%, Voltage Rating=25V, Case/Package=0201, Category="Chip SMD Resistors", China RoHS=Non-Compliant, ComponentLink1Description=https://datasheet.octopart.com:443/RC0201FR-07100RL-Yageo-datasheet-175887523.pdf?src-supplier=Newark, ComponentLink1URL=https://datasheet.octopart.com:443/RC0201FR-07100RL-Yageo-datasheet-175887523.pdf?src-supplier=Newark, ComponentLink2Description=https://datasheet.octopart.com:443/RC0201FR-07100RL-Yageo-datasheet-10025917.pdf?src-supplier=Newark, ComponentLink2URL=https://datasheet.octopart.com:443/RC0201FR-07100RL-Yageo-datasheet-10025917.pdf?src-supplier=Newark, ComponentLink3Description=https://datasheet.octopart.com:443/RC0201FR-07100RL-Yageo-datasheet-12509713.pdf?src-supplier=_legacy+Avnet, ComponentLink3URL=https://datasheet.octopart.com:443/RC0201FR-07100RL-Yageo-datasheet-12509713.pdf?src-supplier=_legacy+Avnet, ComponentLink4Description=https://datasheet.octopart.com:443/RC0201FR-07100RL-Yageo-datasheet-13314888.pdf?src-supplier=Upverter, ComponentLink4URL=https://datasheet.octopart.com:443/RC0201FR-07100RL-Yageo-datasheet-13314888.pdf?src-supplier=Upverter, ComponentLink5Description=https://datasheet.octopart.com:443/RC0201FR-07100RL-Yageo-datasheet-12549147.pdf?src-supplier=Upverter, ComponentLink5URL=https://datasheet.octopart.com:443/RC0201FR-07100RL-Yageo-datasheet-12549147.pdf?src-supplier=Upverter, ComponentLink6Description=https://datasheet.octopart.com:443/RC0201FR-07100RL-Yageo-datasheet-12509741.pdf?src-supplier=Upverter, ComponentLink6URL=https://datasheet.octopart.com:443/RC0201FR-07100RL-Yageo-datasheet-12509741.pdf?src-supplier=Upverter, ComponentLink7Description=https://datasheet.octopart.com:443/RC0201FR-07100RL-Yageo-datasheet-62067350.pdf?src-supplier=element14+APAC, ComponentLink7URL=https://datasheet.octopart.com:443/RC0201FR-07100RL-Yageo-datasheet-62067350.pdf?src-supplier=element14+APAC, ComponentLink8Description=https://datasheet.octopart.com:443/RC0201FR-07100RL-Yageo-datasheet-10911895.pdf?src-supplier=element14+APAC, ComponentLink8URL=https://datasheet.octopart.com:443/RC0201FR-07100RL-Yageo-datasheet-10911895.pdf?src-supplier=element14+APAC, ComponentLink9Description=https://datasheet.octopart.com:443/RC0201FR-07100RL-Yageo-Group-datasheet-176638170.pdf?src-supplier=Future+Electronics, ComponentLink9URL=https://datasheet.octopart.com:443/RC0201FR-07100RL-Yageo-Group-datasheet-176638170.pdf?src-supplier=Future+Electronics, ComponentLink10Description=https://datasheet.octopart.com:443/RC0201FR-07100RL-Yageo-datasheet-164759695.pdf?src-supplier=Future+Electronics, ComponentLink10URL=https://datasheet.octopart.com:443/RC0201FR-07100RL-Yageo-datasheet-164759695.pdf?src-supplier=Future+Electronics, ComponentLink11Description=https://datasheet.octopart.com:443/RC0201FR-07100RL-Yageo-datasheet-127823281.pdf?src-supplier=Future+Electronics, ComponentLink11URL=https://datasheet.octopart.com:443/RC0201FR-07100RL-Yageo-datasheet-127823281.pdf?src-supplier=Future+Electronics, ComponentLink12Description=https://datasheet.octopart.com:443/RC0201FR-07100RL-Yageo-datasheet-137700087.pdf?src-supplier=Future+Electronics, ComponentLink12URL=https://datasheet.octopart.com:443/RC0201FR-07100RL-Yageo-datasheet-137700087.pdf?src-supplier=Future+Electronics, ComponentLink13Description=https://datasheet.octopart.com:443/RC0201FR-07100RL-Yageo-datasheet-103092701.pdf?src-supplier=Future+Electronics, ComponentLink13URL=https://datasheet.octopart.com:443/RC0201FR-07100RL-Yageo-datasheet-103092701.pdf?src-supplier=Future+Electronics, ComponentLink14Description=https://datasheet.octopart.com:443/RC0201FR-07100RL-Yageo-datasheet-98239111.pdf?src-supplier=Future+Electronics, ComponentLink14URL=https://datasheet.octopart.com:443/RC0201FR-07100RL-Yageo-datasheet-98239111.pdf?src-supplier=Future+Electronics, ComponentLink15Description=https://datasheet.octopart.com:443/RC0201FR-07100RL-Yageo-datasheet-44382975.pdf?src-supplier=Future+Electronics, ComponentLink15URL=https://datasheet.octopart.com:443/RC0201FR-07100RL-Yageo-datasheet-44382975.pdf?src-supplier=Future+Electronics, ComponentLink16Description=https://datasheet.octopart.com:443/RC0201FR-07100RL-Yageo-datasheet-41589693.pdf?src-supplier=Future+Electronics, ComponentLink16URL=https://datasheet.octopart.com:443/RC0201FR-07100RL-Yageo-datasheet-41589693.pdf?src-supplier=Future+Electronics, ComponentLink17Description=https://datasheet.octopart.com:443/RC0201FR-07100RL-Yageo-datasheet-37140709.pdf?src-supplier=Future+Electronics, ComponentLink17URL=https://datasheet.octopart.com:443/RC0201FR-07100RL-Yageo-datasheet-37140709.pdf?src-supplier=Future+Electronics, ComponentLink18Description=https://datasheet.octopart.com:443/RC0201FR-07100RL-Yageo-datasheet-12509768.pdf?src-supplier=Future+Electronics, ComponentLink18URL=https://datasheet.octopart.com:443/RC0201FR-07100RL-Yageo-datasheet-12509768.pdf?src-supplier=Future+Electronics, ComponentLink19Description=https://datasheet.octopart.com:443/RC0201FR-07100RL-Yageo-datasheet-12590898.pdf?src-supplier=Future+Electronics, ComponentLink19URL=https://datasheet.octopart.com:443/RC0201FR-07100RL-Yageo-datasheet-12590898.pdf?src-supplier=Future+Electronics, ComponentLink20Description=https://datasheet.octopart.com:443/RC0201FR-07100RL-Yageo-datasheet-8325180.pdf?src-supplier=Future+Electronics, ComponentLink20URL=https://datasheet.octopart.com:443/RC0201FR-07100RL-Yageo-datasheet-8325180.pdf?src-supplier=Future+Electronics, ComponentLink21Description=https://datasheet.octopart.com:443/RC0201FR-07100RL-Yageo-datasheet-12535854.pdf?src-supplier=Future+Electronics, ComponentLink21URL=https://datasheet.octopart.com:443/RC0201FR-07100RL-Yageo-datasheet-12535854.pdf?src-supplier=Future+Electronics, ComponentLink22Description=https://datasheet.octopart.com:443/RC0201FR-07100RL-Yageo-datasheet-148775077.pdf?src-supplier=TME, ComponentLink22URL=https://datasheet.octopart.com:443/RC0201FR-07100RL-Yageo-datasheet-148775077.pdf?src-supplier=TME, ComponentLink23Description=https://datasheet.octopart.com/RC0201FR-07100RL-Yageo-datasheet-73766026.pdf, ComponentLink23URL=https://datasheet.octopart.com/RC0201FR-07100RL-Yageo-datasheet-73766026.pdf, ComponentLink24Description=http://sigma.octopart.com:80/conflict_mineral_statement/Yageo-company-3.pdf?src-supplier=Compliance+Statements, ComponentLink24URL=http://sigma.octopart.com:80/conflict_mineral_statement/Yageo-company-3.pdf?src-supplier=Compliance+Statements, ComponentLink25Description=http://sigma.octopart.com:80/rohs_statement/Yageo-company-2.pdf?src-supplier=Compliance+Statements, ComponentLink25URL=http://sigma.octopart.com:80/rohs_statement/Yageo-company-2.pdf?src-supplier=Compliance+Statements, Composition="Thick Film", Contact Plating=Tin, Features="Moisture Resistant", Height=230µm, Lead Free="Lead Free", Length=600µm, Lifecycle Status=Production, Manufacturer Part Number=RC0201FR-07100RL, Mounting Technology="Surface Mount", Number of Terminals=2, Number of Terminations=2, Power Rating=50mW, Pricing="1=0,1, 10=0,034, 25=0,0252, 50=0,0204, 100=0,0168, 250=0,01316, 500=0,01112, 1000=0,00952, 5000=0,00698 (USD)", Radiation Hardening=No, REACH SVHC=Yes, RoHS=Compliant, Schedule B="8533210045, 8533210045|8533210045|8533210045|8533210045|8533210045|8533210045|8533210045|8533210045|8533210045|8533210045|8533210045|8533210045|8533210045|8533210045|8533210045|8533210045|8533210045|8533210045|8533210045|8533210045|8533210045|8533210045|8533210045|85", Stock=481195, Supplier=DigiKey, Supplier 1=DigiKey, Supplier Part Number 1=311-100MCT-ND, Termination=SMD/SMT, Width=300µm, Working Voltage=25V